# EAGLE board Pure VCF (EAGLE 8.6.0)
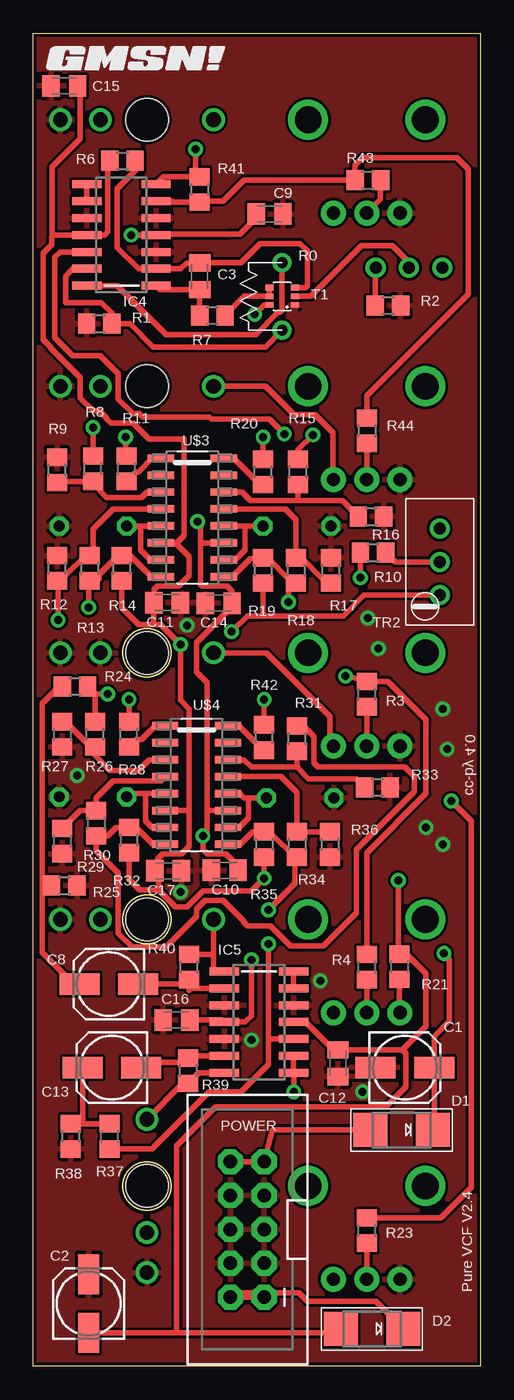
[diagram p0: board, top side]
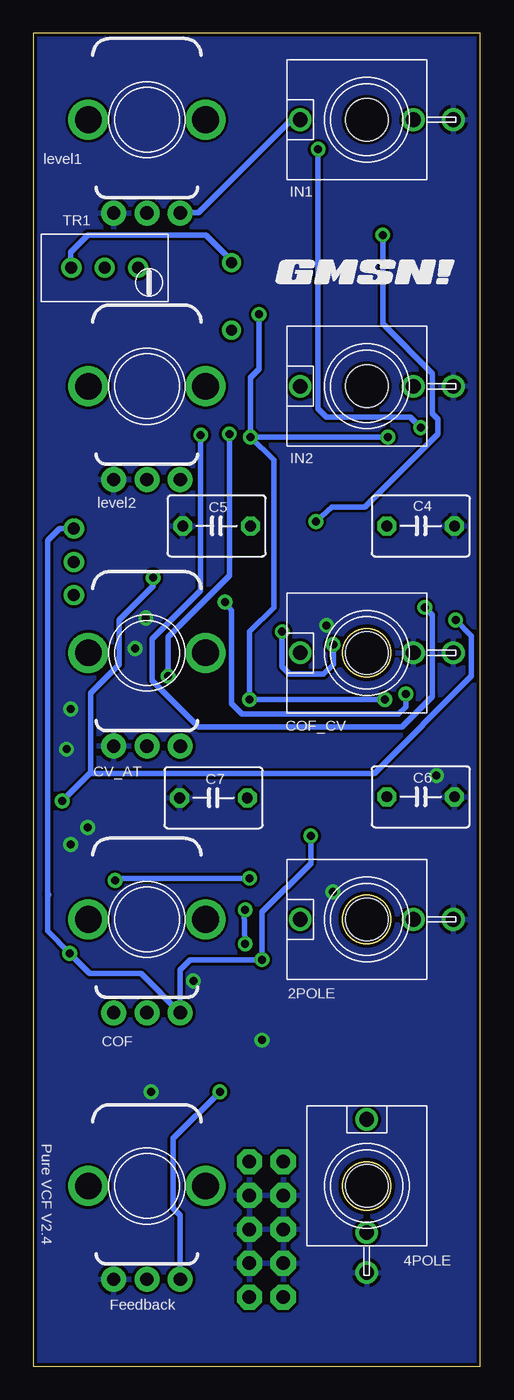
[diagram p1: board, bottom side, seen from below]

Size 33.56 x 100 mm. Coordinates in mm from the lower left corner, seen from the top.
Outline: 33.56,0 0,0 0,100 33.56,100 33.56,0
Copper layers (1*16): Top 0.035mm / dielectric 1.5mm / Bottom 0.035mm
Design rules "SparkFun": minimum track width 8mil, minimum drill 20mil, track to track 8mil, track to pad 8mil, pad to pad 8mil, via to via 8mil, smd to smd 8mil, copper to edge 10mil, drill to drill 8mil, minimum pad ring 12mil, minimum via ring 10mil, stop-mask expansion 4mil, vias tented up to drill 25mil, thermal gap 10mil
Holes 3.2 mm at 8.53,93.52 8.53,73.52 8.53,53.52 8.53,33.52 8.53,13.52

## Footprints (pad centres in the part's own frame; a part is rotated, then mirrored left to right if it is on the bottom)
S_JACK = drill 1.1: GND 0,-6.5; NORM 0,-3.5; TIP 0,5
153CLV-0505 = smd 3 x 1.6: + 2.2,0; - -2.2,0
C0805K = smd 1.3 x 1.6: 1 -1,0; 2 1,0
C050-045X075 = drill 0.813 octagon: 1 -2.54,0; 2 2.54,0
POT = drill 1 pad 1.88: P$1 -2.5,-7; P$2 0,-7; P$3 2.5,-7 | drill 2 pad 2.68: P$4 -4.4,0; P$5 4.4,0
SMADIODE = smd 2.54 x 2.54: A 2.349,0; C -2.349,0
SO14 = smd 0.6 x 2.2: 1 -3.81,-2.6; 2 -2.54,-2.6; 3 -1.27,-2.6; 4 0,-2.6; 5 1.27,-2.6; 6 2.54,-2.6; 7 3.81,-2.6; 8 3.81,2.6; 9 2.54,2.6; 10 1.27,2.6; 11 0,2.6; 12 -1.27,2.6; 13 -2.54,2.6; 14 -3.81,2.6
2X5-SHROUDED = drill 1.016 pad 1.88 octagon: 1 -1.27,5.08; 2 1.27,5.08; 3 -1.27,2.54; 4 1.27,2.54; 5 -1.27,0; 6 1.27,0; 7 -1.27,-2.54; 8 1.27,-2.54; 9 -1.27,-5.08; 10 1.27,-5.08
RESISTOR_TC = drill 0.813: 1 -2.54,0; 2 2.54,0
R0805 = smd 1.3 x 1.5: 1 -0.95,0; 2 0.95,0
TRANS_PAIR = smd 0.42 x 0.6: B1 0,-0.95; B2 -0.65,-0.95; C1 0.65,-0.95; C2 -0.65,0.95; E1 0.65,0.95; E2 0,0.95
TRIMMER_TH3 = drill 0.9: 1 2.5,0; 2 0,0; 3 -2.5,0
SOIC-16_BLANK = smd 1.981 x 0.559: 1 -2.362,4.445; 2 -2.362,3.175; 3 -2.362,1.905; 4 -2.362,0.635; 5 -2.362,-0.635; 6 -2.362,-1.905; 7 -2.362,-3.175; 8 -2.362,-4.445; 9 2.362,-4.445; 10 2.362,-3.175; 11 2.362,-1.905; 12 2.362,-0.635; 13 2.362,0.635; 14 2.362,1.905; 15 2.362,3.175; 16 2.362,4.445

## Placement (x,y rotation side)
2POLE  S_JACK  [S_JACK]  8.53,33.52 90 bottom
4POLE  S_JACK  [S_JACK]  8.53,13.52 0 bottom
C1  10u  [153CLV-0505]  27.89,22.4 0 top
C2  10u  [153CLV-0505]  4.16,4.7 90 top
C3  20pF  [C0805K]  12.49,81.77 270 top
C4  220p  [C050-045X075]  4.48,63.04 0 bottom
C5  220p  [C050-045X075]  19.8,63.04 180 bottom
C6  220p  [C050-045X075]  4.48,42.72 0 bottom
C7  220p  [C050-045X075]  20.03,42.64 180 bottom
C8  10u  [153CLV-0505]  5.67,28.67 180 top
C9  0.1u  [C0805K]  17.74,86.45 0 top
C10  0.1u  [C0805K]  14.37,37.21 180 top
C11  0.1u  [C0805K]  10.05,57.28 180 top
C12  0.1u  [C0805K]  22.86,22.73 90 top
C13  10u  [153CLV-0505]  5.91,22.4 180 top
C14  0.1u  [C0805K]  13.92,57.25 180 top
C15  0.1u  [C0805K]  2.33,96.06 0 top
C16  0.1u  [C0805K]  10.75,25.97 180 top
C17  0.1u  [C0805K]  10.11,37.17 180 top
COF  100K  [POT]  25.03,33.52 0 bottom
COF_CV  S_JACK  [S_JACK]  8.53,53.52 90 bottom
CV_AT  100K  [POT]  25.03,53.52 0 bottom
D1  [SMADIODE]  27.65,17.72 180 top
D2  [SMADIODE]  25.43,2.8 180 top
IC4  TL074D  [SO14]  6.62,84.87 90 top
IC5  TL074D  [SO14]  16.94,25.82 270 top
IN1  [S_JACK]  8.53,93.52 90 bottom
IN1POT  100K  [POT]  25.03,93.52 0 bottom
IN1POT1  100K  [POT]  25.03,73.52 0 bottom
IN2  [S_JACK]  8.53,73.52 90 bottom
JP1  M05X2SHD  [2X5-SHROUDED]  16.07,10.26 180 top
Q  100k  [POT]  25.03,13.52 0 bottom
R0  2k  [RESISTOR_TC]  18.68,80.27 90 top
R1  100k  [R0805]  4.95,78.2 0 top
R2  390R  [R0805]  26.62,79.55 180 top
R3  100k  [R0805]  25.04,50.42 90 top
R4  100k  [R0805]  25.04,29.94 90 top
R6  2M***  [R0805]  6.7,90.43 0 top
R7  2k2  [R0805]  13.45,78.84 0 top
R8  100k  [R0805]  4.48,67.33 90 top
R9  220R  [R0805]  1.78,67.25 90 top
R10  100k  [R0805]  25.51,61.06 0 top
R11  33k  [R0805]  7.02,67.33 90 top
R12  220R  [R0805]  1.78,59.87 90 top
R13  100k  [R0805]  4.24,59.87 270 top
R14  10k  [R0805]  6.62,59.87 270 top
R15  100k  [R0805]  19.88,67.09 90 top
R16  220R  [R0805]  25.35,63.76 0 top
R17  220R  [R0805]  22.34,59.71 90 top
R18  100k  [R0805]  19.72,59.71 270 top
R19  10k  [R0805]  17.26,59.71 270 top
R20  33k  [R0805]  17.26,67.09 90 top
R21  75k  [R0805]  27.49,29.97 270 top
R23  10k  [R0805]  25.04,10.18 90 top
R24  100k  [R0805]  3.13,50.98 180 top
R25  100k  [R0805]  2.33,36.05 0 top
R26  100k  [R0805]  4.64,47.41 90 top
R27  220R  [R0805]  2.17,47.41 270 top
R28  33k  [R0805]  7.18,47.41 90 top
R29  220R  [R0805]  2.17,39.39 270 top
R30  100k  [R0805]  4.71,40.74 270 top
R31  100k  [R0805]  19.8,47.09 90 top
R32  10k  [R0805]  7.18,39.47 270 top
R33  220R  [R0805]  25.83,43.44 0 top
R34  100k  [R0805]  19.8,39.15 270 top
R35  10k  [R0805]  17.34,39.15 270 top
R36  220R  [R0805]  22.26,39.15 270 top
R37  100k  [R0805]  5.75,17.24 90 top
R38  100k  [R0805]  2.81,17.24 270 top
R39  100k  [R0805]  11.62,22.16 270 top
R40  100k  [R0805]  11.7,29.94 90 top
R41  100k  [R0805]  12.49,88.28 270 top
R42  33k  [R0805]  17.34,47.17 90 top
R43  100k  [R0805]  25.11,89 0 top
R44  100k  [R0805]  25.04,70.19 270 top
T1  TRANS_PAIR_PNP  [TRANS_PAIR]  18.68,80.27 90 top
TR1  100k  [TRIMMER_TH3]  28.2,82.41 0 bottom
TR2  TRIMMER_TH3  [TRIMMER_TH3]  30.51,60.34 270 top
U$1  [GMSN!_LOGO]  8.37,82.01 0 bottom
U$2  [GMSN!_LOGO]  7.97,98.05 0 top
U$3  LM13700  [SOIC-16_BLANK]  11.94,63.68 0 top
U$4  LM13700  [SOIC-16_BLANK]  12.26,43.59 0 top

## Library data of the parts
2POLE 4POLE C3 C8 C13 COF COF_CV CV_AT IC4 IC5 IN1POT IN1POT1 Q R1-R4 R6-R20 R23-R44 T1 TR1 TR2 U$3 U$4 = GMSN
C1 C2 C4-C7 C9-C12 C14-C17 R21 = rcl
D1 D2 = adafruit
IN1 IN2 R0 = INSTRUO
JP1 = SparkFun-Connectors
U$1 U$2 = gmsnLogo

## Nets
+12V: C1.+ C9.1 C10.1 C14.1 C16.1 COF.P$3 D1.C IC4.4 IC5.4 TR2.3 U$3.11 U$4.11
-12V: C2.- C11.2 C12.2 C15.2 C17.2 D2.A IC4.11 IC5.11 R6.1 R14.2 R19.2 R21.1 R32.2 R35.2 TR2.1 U$3.6 U$4.6
GND: 2POLE.GND 4POLE.GND C1.- C2.+ C4.2 C5.2 C6.2 C7.2 C9.2 C10.2 C11.1 C12.1 C14.2 C15.1 C16.2 C17.1 COF_CV.GND COF_CV.NORM CV_AT.P$1 IC4.3 IC4.5 IC4.10 IC5.3 IC5.5 IC5.12 IN1.GND IN1POT1.P$1 IN1POT.P$1 IN2.GND JP1.3 JP1.4 JP1.5 JP1.6 JP1.7 JP1.8 Q.P$1 R1.1 R2.1 R9.2 R12.2 R16.2 R17.2 R25.2 R27.2 R29.2 R33.2 R36.2 R38.2 T1.B2
N$1: C5.1 U$3.10 U$3.12
N$2: T1.B1 TR1.2
N$3: R2.2 TR1.1
N$4: R10.1 R12.1 R13.1 R23.2 U$3.4
N$5: IC4.14 R0.2 TR1.3
N$6: IC4.13 R0.1 R1.2
N$7: COF_CV.TIP CV_AT.P$3
N$8: IC4.12 R3.2 R4.2
N$9: CV_AT.P$2 R3.1
N$10: COF.P$2 R4.1
N$11: C3.1 IC4.2 R6.2 T1.C1
N$12: C3.2 IC4.1 R7.1
N$13: R11.1 U$3.1
N$14: R7.2 T1.E1 T1.E2
N$15: IC4.6 R41.2 R43.1 R44.1
N$16: R18.2 R19.1 R24.1 R26.2 U$3.9
N$17: R8.1 R9.1 U$3.3
N$18: C8.- IC5.2 R40.1
N$19: Q.P$2 R23.1
N$20: IC5.8 IC5.9 Q.P$3
N$21: C13.- IC5.6 R39.1
N$22: R20.1 U$3.16
N$23: R15.1 R16.1 U$3.14
N$24: R17.1 R18.1 U$3.13
N$25: COF.P$1 R21.2
N$26: C8.+ R24.2 R25.1
N$27: C4.1 U$3.5 U$3.7
N$28: R13.2 R14.1 R15.2 U$3.8
N$29: R26.1 R27.1 U$4.3
N$30: 2POLE.TIP IC5.1 R40.2
N$31: R42.1 U$4.16
N$32: IC4.7 R8.2 R41.1
N$33: R29.1 R30.1 U$4.4
N$35: R11.2 R20.2 R28.2 R42.2 T1.C2
N$36: C13.+ R37.2 R38.1
N$37: IC5.13 IC5.14
N$38: D1.A JP1.9 JP1.10
N$39: IC4.8 IC4.9
N$40: R34.1 R36.1 U$4.13
N$41: 4POLE.TIP IC5.7 R39.2
N$43: R31.1 R33.1 U$4.14
N$44: R30.2 R31.2 R32.1 U$4.8
N$46: IC5.10 R34.2 R35.1 R37.1 U$4.9
N$47: IN1.TIP IN1POT.P$3
N$49: IN1POT1.P$3 IN2.TIP
N$50: D2.C JP1.1 JP1.2
N$53: IN1POT.P$2 R43.2
N$54: R10.2 TR2.2
N$55: IN1POT1.P$2 R44.2
N$57: C6.1 U$4.5 U$4.7
N$58: C7.1 U$4.10 U$4.12
N$59: R28.1 U$4.1

## Tracks (layer width: path | path; a pad name or v marks a point on that pad's centre or on a via)
+12V  (via drill 0.6)
  Top 0.406: 13.05,41.69 13.05,51.29 12.26,52.09 12.26,54.31 14.64,56.69 14.64,56.96 C14.1 14.92,58.15 14.56,58.52 12.65,58.52 12.57,58.6 12.57,61.77 | U$4.11 13.05,41.69 | C16.1 14.18,25.97 IC5.4 15.91,25.82 16.38,26.29 v16.38,30.5 | D1.C 30.09,17.81 C1.+ 30.09,24.76 31.23,25.89 31.23,30.5 30.83,30.89 v30.83,30.97 | 12.57,61.77 U$3.11 | 12.57,61.77 12.57,62.96 12.18,63.36 v12.34,63.36 | v7.33,84.87 IC4.4 9.29,84.94 14.68,84.94 14.69,84.95 15.51,84.95 16.74,86.18 C9.1 | C10.1 15.37,37.54 14.48,38.44 13.05,38.44 12.73,38.75 v12.73,39.78 13.05,40.11 13.05,41.69
  Bottom 0.406: TR2.3 31.58,62.84 32.5,61.93 32.5,35.42 | 32.5,35.42 32.5,32.64 v30.83,30.97 29.32,29.47 25.48,29.47 COF.P$3 22.53,29.75 21.78,30.5 v16.38,30.5 16.38,34.07 12.73,37.72 v12.73,39.78 | 32.42,35.34 32.5,35.42 | v7.33,84.87 7.33,78.2 3.6,74.47 3.6,71.46 3.21,71.06 3.21,69.95 8.68,64.47 11.14,64.47 v12.34,63.36
-12V  (via drill 0.6)
  Top 0.406: 11.05,61.39 10.67,61.77 U$3.6 9.5,61.69 10.67,61.69 | 10.67,61.69 11.3,62.33 11.3,69.55 8.68,69.55 7.49,70.74 5.83,70.74 5.51,71.06 5.51,71.14 4.95,71.69 4.48,71.69 3.52,72.65 3.52,74.15 1.3,76.38 1.3,76.46 0.75,77.01 0.75,83.52 1.38,84.16 1.38,84.71 1.54,84.87 | 11.7,41.69 11.7,49.31 11.05,49.96 v11.05,54.15 9.54,55.66 9.16,55.66 | R35.2 v17.34,36.61 | R32.2 7.18,36.53 7.97,35.74 9.4,35.74 | TR2.1 24.84,57.84 23.29,56.3 17.26,56.3 | v14.88,55.1 16.07,56.3 17.26,56.3 | 17.26,56.3 R19.2 | R14.2 6.62,56.93 7.89,55.66 9.16,55.66 | C2.- 10.83,2.5 | 10.83,2.5 22.79,2.5 D2.A 23.08,2.37 23.13,2.32 | IC5.11 20.43,25.82 22.52,23.73 C12.2 27.71,23.73 | v27.42,36.45 27.42,30.99 R21.1 27.59,30.82 28.13,30.82 29.48,29.47 29.48,25.5 27.71,23.73 | 27.71,23.73 27.97,23.47 27.97,20.97 26.46,19.46 13.68,19.46 10.75,16.53 10.75,2.58 10.83,2.5 | R6.1 5.59,90.27 5.59,85.11 5.35,84.87 IC4.11 1.54,84.87 | 17.02,36.29 v17.34,36.61 | 9.16,55.66 9.05,55.77 C11.2 9.08,57.32 9.08,58.28 9.32,58.52 10.91,58.52 11.7,59.31 11.7,60.74 10.75,61.69 10.67,61.69 | 1.54,84.87 1.43,84.87 1.43,90 3.52,92.09 3.52,95.87 C15.2 | 9.4,35.74 10.67,34.47 11.54,34.47 12.73,35.66 16.38,35.66 v17.34,36.61 | 9.4,35.74 9.4,37.28 C17.2 9.32,37.53 9.32,38.04 9.72,38.44 11.14,38.44 11.7,38.99 11.7,41.69 | U$4.6 11.7,41.69
  Bottom 0.406: v17.34,36.61 27.26,36.61 v27.42,36.45 | v14.88,55.1 14.88,52.48 14.32,51.93 11.76,51.93 11.05,52.64 v11.05,54.15
GND  (via drill 0.6)
  other vias: 24.72,20.58 30.75,49.31 31.07,46.29 29.48,40.42 30.75,39.15 25.11,56.14 25.91,53.83 16.38,24.47 21.54,28.91 3.29,44.31 11.54,55.58 11.06,35.58
  pour Top: -1,100.11 34.56,100.11 34.56,-0.22 -1,-0.22
  pour Bottom: -1,100.11 34.56,100.11 34.56,-0.22 -1,-0.22
N$1
  Top 0.406: U$3.12 15.99,63.04 | 15.99,63.04 C5.1 | U$3.10 15.19,60.5 15.91,61.22 15.91,62.96 15.99,63.04
N$2
  Top 0.406: TR1.2 28.2,82.82 26.94,84.08 24.64,84.08 20.83,80.27 T1.B1
N$3
  Top 0.406: R2.2 25.67,82.38 TR1.1
N$4  (via drill 0.6)
  Top 0.406: U$3.4 5.99,64.31 4.48,62.8 4.48,61.05 R13.1 3.92,60.82 2.33,59.23 2.09,59.23 R12.1 1.86,58.84 v1.86,55.98 | R10.1 v24.56,59.16 v24.56,59.15 | R23.2 30.59,11.13 32.89,13.43 32.89,40.9 v31.38,42.4
  Bottom 0.406: v24.56,59.15 24.56,58.52 27.1,55.98 27.1,52.64 29.24,50.5 29.24,44.47 | 29.24,44.47 7.97,44.47 0.67,51.77 0.67,54.79 v1.86,55.98 | 29.24,44.47 29.32,44.47 v31.38,42.4
N$5
  Top 0.406: R0.2 18.68,79.23 18.53,79.08 18.37,79.08 16.7,77.41 9.95,77.41 6.3,81.06 IC4.14
  Bottom 0.406: R0.2 18.61,82.89 20.59,84.87 29.48,84.87 30.75,83.6 30.75,82.46 TR1.3
N$6
  Top 0.406: 18.45,77.73 R0.1 17.41,76.46 9,76.46 7.26,78.2 R1.2 5.91,79 5.11,79.79 2.41,79.79 2.41,81.77 2.97,82.33 IC4.13
N$7
  Top 0.406: COF_CV.TIP 17.49,53.52 22.26,48.75 22.26,46.79 CV_AT.P$3
N$8  (via drill 0.6)
  Top 0.406: IC4.12 2.02,83.6 1.62,83.2 1.62,77.17 2.97,75.82 5.03,75.82 6.38,74.47 6.38,72.57 7.49,71.46 7.97,71.46 8.21,71.22 13.21,71.22 13.37,71.06 17.73,71.06 v18.84,69.95 | v23.45,51.77 24.95,51.45 R3.2 26.62,51.37 29.48,48.52 29.48,42.96 25.04,38.52 R4.2
  Bottom 0.406: v18.84,69.95 18.84,59.31 23.45,54.71 v23.45,51.77
N$9
  Top 0.406: R3.1 CV_AT.P$2
N$10
  Top 0.406: R4.1 COF.P$2
N$11
  Top 0.406: T1.C1 20.45,80.92 20.59,81.06 20.59,83.68 20.03,84.23 17.02,84.23 15.59,82.81 12.53,82.81 C3.1 11.51,82.77 11.06,82.33 IC4.2 7.89,82.33 6.3,83.92 6.3,88.36 7.65,89.71 R6.2
N$12
  Top 0.406: IC4.1 9.51,80.77 C3.2 R7.1
N$13
  Top 0.406: U$3.1 8.92,68.12 7.89,67.09 7.73,67.09 R11.1
N$14
  Top 0.406: T1.E1 T1.E2 15.83,80.27 R7.2
N$15
  Top 0.406: IC4.6 10.43,87.41 10.51,87.33 R41.2 12.57,87.41 14.24,87.41 15.83,89 R43.1 24.16,90.11 24.72,90.66 31.78,90.66 32.66,89.79 32.66,80.42 25.04,72.8 R44.1
N$16  (via drill 0.6)
  Top 0.406: U$3.9 14.95,59.23 16.3,60.58 17.18,60.58 R19.1 17.58,60.66 19.24,58.99 19.48,58.99 R18.2 19.16,58.2 v19.16,57.33 | R26.2 4.64,50.42 | 4.64,50.42 R24.1 | 4.64,50.42 v5.59,50.42
  Bottom 0.406: v5.59,50.42 5.59,49.47 6.14,48.91 17.89,48.91 18.68,49.71 18.68,56.69 v19.16,57.33
N$17
  Top 0.406: R9.1 1.86,66.38 R8.1 4.48,66.22 5.51,65.19 8.13,65.19 8.53,65.58 U$3.3
N$18
  Top 0.406: 8.18,28.12 C8.- 11.7,28.67 11.7,28.36 | R40.1 11.7,28.36 | 11.7,28.2 11.7,28.36 | 11.7,28.36 IC5.2
N$19
  Top 0.406: R23.1 Q.P$2
N$20  (via drill 0.6)
  Top 0.406: v19.56,20.58 19.56,21.99 IC5.8 IC5.9
  Bottom 0.406: Q.P$3 22.53,11.32 23.05,11.84 23.05,17.08 v19.56,20.58
N$21
  Top 0.406: IC5.6 12.09,23.28 R39.1 11.62,22.8 8.6,22.8 8.6,22.4 C13.-
N$22
  Top 0.406: U$3.16 15.03,68.12 16.7,66.45 16.94,66.45 R20.1
N$23
  Top 0.406: U$3.14 15.67,65.58 16.3,64.95 19.95,64.95 | 19.95,64.95 23.21,64.95 R16.1 | R15.1 19.88,65.03 19.95,64.95
N$24
  Top 0.406: U$3.13 18.92,64.31 19.72,63.52 R18.1 20.12,60.66 21.78,58.99 22.1,58.99 R17.1
N$25
  Top 0.406: R21.2 27.49,26.56 COF.P$1
N$26
  Top 0.406: R24.2 1.94,50.98 0.67,49.71 0.67,35.97 | 0.67,35.97 0.67,31.05 3.05,28.67 C8.+ 3.37,28.54 | R25.1 0.75,36.05 0.67,35.97
N$27
  Top 0.406: U$3.5 8.13,63.04 | 8.13,63.04 C4.1 | U$3.7 8.76,60.5 8.05,61.22 8.05,62.96 8.13,63.04
N$28  (via drill 0.6)
  Top 0.406: R14.1 6.7,60.82 | R14.1 7.26,60.82 8.84,59.23 U$3.8 | R14.1 6.3,60.5 6.06,60.5 4.95,59.39 4.95,59.07 4.63,59.07 R13.2 4.16,58.84 v4.16,56.93 | R15.2 19.88,68.76 v20.99,69.87
  Bottom 0.406: v20.99,69.87 20.99,58.2 24.64,54.55 24.64,51.45 21.15,47.96 5.91,47.96 3.6,50.26 3.6,56.37 v4.16,56.93
N$29
  Top 0.406: U$4.3 8.68,45.5 7.89,44.71 5.75,44.71 4.64,45.82 R26.1 4.48,46.61 4.16,46.61 2.74,48.03 2.74,48.35 R27.1
N$30
  Top 0.406: 2POLE.TIP 13.53,30.89 | IC5.1 13.53,29.62 13.53,30.89 | 13.53,30.89 R40.2
N$31
  Top 0.406: R42.1 17.25,46.22 15.43,48.04 U$4.16
N$32  (via drill 0.6)
  Top 0.406: IC4.7 9.77,89.23 R41.1 12.18,89.55 v12.18,91.3 | R8.2 v4.48,70.42
  Bottom 0.406: v12.18,91.3 12.18,71.85 11.54,71.22 5.27,71.22 v4.48,70.42
N$33
  Top 0.406: U$4.4 9.58,43.91 5.99,43.91 4.71,42.64 R30.1 3.52,41.69 R29.1
N$35  (via drill 0.6)
  Top 0.406: R42.2 v17.34,50.02 | v7.18,50.02 R28.2 | R20.2 v17.26,69.71 | v6.94,69.71 6.94,68.36 R11.2 | T1.C2 17.32,79.62 v16.62,78.92
  Bottom 0.406: v17.26,69.71 v6.94,69.71 | v16.62,78.92 16.62,74.79 17.26,74.15 v17.26,69.71 | v7.18,50.02 v17.34,50.02 17.34,55.1 15.51,56.93 15.51,67.96 v17.26,69.71
N$36
  Top 0.406: C13.+ 3.71,18.22 3.68,18.19 | 3.68,18.19 R38.1 | R37.2 3.69,18.19 3.68,18.19
N$37
  Top 0.406: IC5.14 IC5.13
N$38
  Top 0.406: JP1.10 JP1.9 17.97,17.72 D1.A
N$39
  Top 0.406: IC4.8 IC4.9
N$40
  Top 0.406: U$4.13 18.61,44.23 19.8,43.04 R34.1 R36.1
N$41
  Top 0.406: R39.2 11.54,21.53 | R39.2 11.22,21.21 4POLE.TIP | IC5.7 12.41,22 R39.2
N$43
  Top 0.406: U$4.14 15.83,45.5 16.38,44.94 19.88,44.94 | R31.1 19.8,45.02 19.88,44.94 | 19.88,44.94 19.88,44.86 20.67,44.07 24.24,44.07 R33.1
N$44
  Top 0.406: U$4.8 9,39.15 7.73,40.42 R32.1 6.22,40.42 5.59,39.78 5.35,39.78 | R31.2 20.27,48.04 21.07,47.25 21.07,45.26 21.38,44.94 27.89,44.94 28.61,44.23 28.61,43.12 24.24,38.75 24.24,33.99 21.78,31.53 19.32,31.53 17.81,33.04 16.07,33.04 15.83,33.28 15.83,33.36 14.24,34.94 12.89,34.94 12.26,34.31 12.26,33.75 9.95,31.45 7.41,31.45 6.38,32.48 6.38,37.01 4.71,38.67 4.71,39.15 5.35,39.78 | 5.35,39.78 R30.2
N$46  (via drill 0.6)
  Top 0.406: R34.2 19.64,38.2 | 19.64,38.2 17.89,39.94 17.49,39.94 R35.1 16.46,40.1 15.51,39.15 U$4.9 | R37.1 8.92,16.29 13.21,20.58 15.59,20.58 17.65,22.64 17.65,24.39 | 19.64,38.2 19.64,36.21 v17.65,34.23 | 17.65,24.39 v17.65,31.69 | IC5.10 17.81,24.54 17.65,24.39
  Bottom 0.406: 17.65,34.07 v17.65,34.23 17.73,34.15 v17.65,31.69
N$47
  Bottom 0.406: IN1.TIP 14.16,93.52 21.15,86.54 22.51,86.54 IN1POT.P$3
N$49
  Top 0.406: IN2.TIP 17.41,73.52 19.56,71.38 21.15,71.38 22.5,70.03 22.5,66.55 IN1POT1.P$3
N$50
  Top 0.406: D2.C 25.72,4.86 20.59,4.86 19.95,5.5 15.91,5.5 JP1.1 | JP1.1 JP1.2 | 15.59,5.5 JP1.1
N$53
  Top 0.406: R43.2 26.06,87.55 IN1POT.P$2
N$54
  Top 0.406: TR2.2 27.18,60.34 R10.2
N$55
  Top 0.406: R44.2 IN1POT1.P$2
N$57
  Top 0.406: U$4.5 8.45,42.96 | 8.45,42.96 7.26,42.96 C6.1 | U$4.7 8.92,40.42 8.45,40.9 8.45,42.96
N$58
  Top 0.406: C7.1 16.22,42.64 | 16.22,42.64 15.83,42.64 15.51,42.96 U$4.12 | U$4.10 15.43,40.42 16.14,41.13 16.14,42.56 16.22,42.64
N$59
  Top 0.406: U$4.1 9.16,48.04 8.13,47.01 7.73,47.01 R28.1

## Text on the board
tPlace: T1 | cc-by 4.0 | POWER | Pure VCF V2.4
bPlace: level1 | level2 | CV_AT | COF | Pure VCF V2.4 | Feedback